# Altium PCB SolarPanelPCB_3U_FB_Rev4.14.PcbDoc
Units mm, origin at the board's own origin, x right, y up, seen from the top; angles counter-clockwise.
Board outline 82 x 331.6 mm, 2 copper layers (Top Layer, Bottom Layer), stack 0.56 mm thick; 16 components, 8 nets, 59 pads, 12 vias.
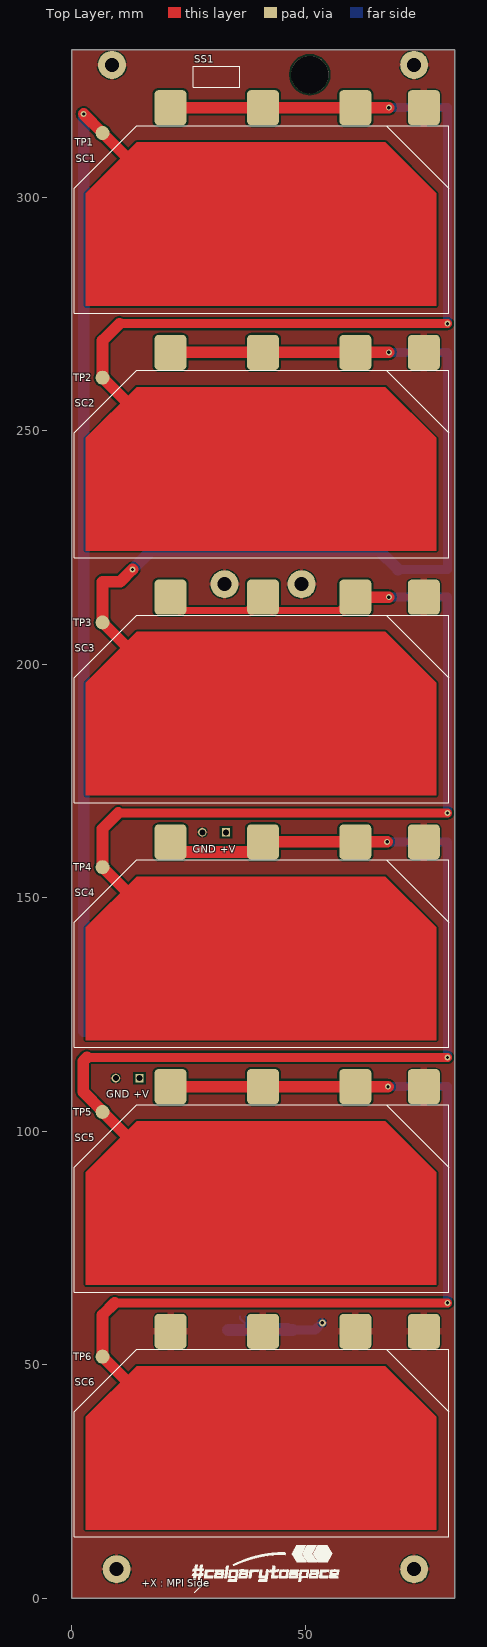
[diagram p0: Top Layer view]
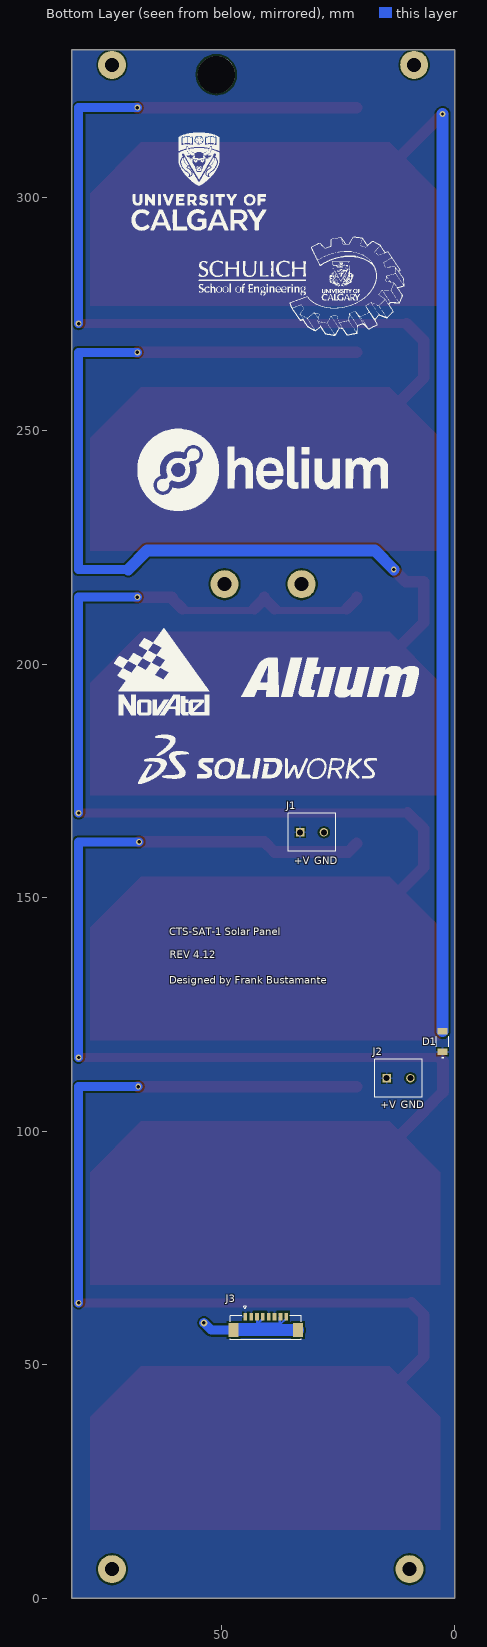
[diagram p1: Bottom Layer view, seen from below]
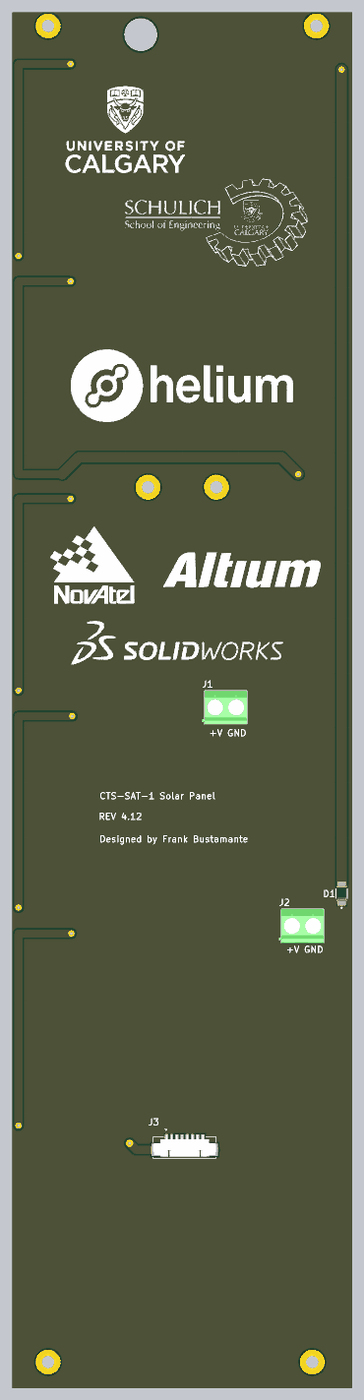
[diagram p2: 3D render of the assembled board from below, using the file's embedded part models]

## Layer stack, top to bottom
Top Solder: solder mask 0.0102, Solder Resist, Dk 3.5
Top Layer: signal copper 0.03
Dielectric 1: core 0.5, FR-4, Dk 4.5
Bottom Layer: signal copper 0.03
Bottom Solder: solder mask 0.0102, Solder Resist, Dk 3.5

## Board outline
0,0 82,0 82,331.6 0,331.6

## Design rules (kind name [scope] priority, off if disabled: settings)
Clearance [InNetClass('Standard_SolarPanel_PCB')] p1: gap=0.4 ignorepadtopadclearanceinfootprint=TRUE
HoleSize [All] p1: absolutevalues=TRUE maxlimit=4 minlimit=0.025 maxpercent=80.000 minpercent=20.000
PolygonConnect [All] p1: connectstyle=Relief reliefconductorwidth=0.254 reliefentries=4 polygonreliefangle="90 Angle" airgapwidth=0.254
RoutingVias [All] p1: holewidth=0.711 width=1.27 viastyle="Through Hole" minholewidth=0.711 minwidth=1.27 maxholewidth=0.711 maxwidth=1.27
SolderMaskExpansion [All] p1: expansion=0.102 istentingtop=FALSE
Width SolarPanel_route_widths [InNetClass('Standard_SolarPanel_PCB')] p1: maxlimit=6 minlimit=0.254 preferedwidth=2.5 checkconnectedcopper=TRUE
29 further rules are at their usual default settings.

## Classes and differential pairs
net class Standard_SolarPanel_PCB: GND V_Panel V_SC1 V_SC2 V_SC3 V_SC4 V_SC5 V_SC6
component class Shiym_Solar_Panel: J1 J2 J3 SC1 SC2 SC3 SC4 SC5 SC6 TP1 TP2 TP3 TP4 TP5 TP6

## Components (designator, comment, footprint, x,y, rotation, side; value= is the part's Value field where it differs from the comment)
D1 "PMEG3050EP,115" FP-SOD128-MFG 2.575,119.2 r90 bottom
J1 "1729128" PHOE-1729128-2_V 30.525,164.025 r180 bottom
J2 "1729128" PHOE-1729128-2_V 12,111.375 r180 bottom
J3 "J-0532610871" J-532610871 40.425,57.95 r180 bottom
SC1 "SOLAR CELL" SOL_CEL_SHYIM 40.675,295.25 r0 top
SC2 "SOLAR CELL" SOL_CEL_SHYIM 40.675,242.85 r0 top
SC3 "SOLAR CELL" SOL_CEL_SHYIM 40.675,190.45 r0 top
SC4 "SOLAR CELL" SOL_CEL_SHYIM 40.675,138.05 r0 top
SC5 "SOLAR CELL" SOL_CEL_SHYIM 40.675,85.65 r0 top
SC6 "SOLAR CELL" SOL_CEL_SHYIM 40.675,33.25 r0 top
TP1 "TP" TP#1 6.625,313.35 r270 top
TP2 "TP" TP#2 7.325,261.85 r270 top
TP3 "TP" TP#3 6.325,206.75 r90 top
TP4 "TP" TP#4 6.525,155.15 r90 top
TP5 "TP" TP#5 6.725,104.35 r270 top
TP6 "TP" TP#6 6.525,51.75 r270 top

## Footprints (in the part's own frame and the unit in brackets; to place one, negate y for a bottom-side part, rotate by r counter-clockwise, add the part's x,y. Pads: shape width x height; smd on the part's side, far side on the other; paste and mask are expansions set on the pad)
FP-SOD128-MFG [mm]
  rect 1.4x2.1 smd paste-1000 mask+0: 1(-2.2,0) 2(2.2,0)
  silkscreen extent -3.57,-1.35 1.12,1.35, body extent -2.35,-1.25 2.35,1.25, height 1.1
J-532610871 [mm]
  rect 0.8x1.6 smd mask+0: 1(-4.375,2.4) 2(-3.125,2.4) 3(-1.875,2.4) 4(-0.625,2.4) 5(0.625,2.4) 6(1.875,2.4) 7(3.125,2.4) 8(4.375,2.4)
  rect 2.1x3 smd mask+0: S1(-6.925,-0.5) S2(6.925,-0.5)
  silkscreen extent -7.57,-2.6 7.57,4.58, body extent -7.57,-2.14 7.57,3.06, height 3.38
PHOE-1729128-2_V [mm] "Receptacle, 2-Leads, Body 8.1x10.16mm, Pitch 5.08mm"
  rect 1.8x1.8 hole 1.3: 1(-2.54,0)
  round 1.8 hole 1.3: 2(2.54,0)
  silkscreen extent -5.08,-4.05 5.08,4.05, body extent -5.65,-4.05 5.08,4.05, height 10.01
SOL_CEL_SHYIM [mm]
  round 0.025 smd: +V_Cell(0,0)
  rrect25% 6.83x7.5 smd: -V_Cell(-19.5,23.925) -V_Cell(0.3,23.925) -V_Cell(20.075,23.925) -V_Cell(34.746,23.925)
  Top Layer region: -37.625,-18.5 -37.625,5.625 -26.75,16.5 26.5,16.5 37.375,5.625 37.375,-18.5
  silkscreen extent -40.07,-20.07 40.07,20.08
TP#1 [mm]
  round 3 smd: TP_3mm(-0.4,0)
TP#2 [mm]
  round 3 smd: TP_3mm(0.5,-0.7)
TP#3 [mm]
  round 3 smd: TP_3mm(2.2,-0.3)
TP#4 [mm]
  round 3 smd: TP_3mm(1.4,-0.1)
TP#5 [mm]
  round 3 smd: TP_3mm(0.2,-0.1)
TP#6 [mm]
  round 3 smd: TP_3mm(0,0.1)

## Part data
D1: library part CMP-14398-000051-1, "DIODE SCHOTTKY 30V 5A SOD128", RoHS Compliant=Yes
J1 J2: library part CMP-2000-05815-1, "PCB Terminal Block, 13.5 A, 400 V, 2-Pin THD, RoHS, Bulk", Current Rating=13500mA, Manufacturer="Phoenix Contact", Package Description="2-Pin Through Hole Device, Body 8.1 x 10.16 mm, Pitch 5.08 mm", Package Reference=1729128-2, Package Version=03/2015, Voltage Rating=400V, Category="Terminal Blocks", ComponentLink1Description=https://datasheet.ciiva.com:443/pdfs/VipMasterIC/IC/PCON/PCON-S-A0008047989/PCON-S-A0008036843-1.pdf?src-supplier=IHS+Markit, ComponentLink1URL=https://datasheet.ciiva.com:443/pdfs/VipMasterIC/IC/PCON/PCON-S-A0008047989/PCON-S-A0008036843-1.pdf?src-supplier=IHS+Markit, ComponentLink2Description=https://datasheet.ciiva.com/16046/1729128-16046181.pdf?src-supplier=Onlinecomponents.com, ComponentLink2URL=https://datasheet.ciiva.com/16046/1729128-16046181.pdf?src-supplier=Onlinecomponents.com, ComponentLink3Description=https://datasheet.ciiva.com/15169/getdatasheetpartid-199310-15169845.pdf?src-supplier=Verical, ComponentLink3URL=https://datasheet.ciiva.com/15169/getdatasheetpartid-199310-15169845.pdf?src-supplier=Verical, ComponentLink4Description=https://datasheet.ciiva.com/823/1729128-823779.pdf?src-supplier=Digi-Key, ComponentLink4URL=https://datasheet.ciiva.com/823/1729128-823779.pdf?src-supplier=Digi-Key, ComponentLink5Description=https://datasheet.ciiva.com/14607/70054405-14607157.pdf?src-supplier=Allied+Electronics, ComponentLink5URL=https://datasheet.ciiva.com/14607/70054405-14607157.pdf?src-supplier=Allied+Electronics, ComponentLink6Description=https://datasheet.ciiva.com/29218/743664-da-01-en-printklemmenblock-mkdsn-1-5-2-5-08-29218154.pdf?src-supplier=Conrad, ComponentLink6URL=https://datasheet.ciiva.com/29218/743664-da-01-en-printklemmenblock-mkdsn-1-5-2-5-08-29218154.pdf?src-supplier=Conrad, Datasheet URL=https://datasheet.ciiva.com/16046/1729128-16046181.pdf, Datasheet Version=12/2013, Fastening Method=SCREW, Manufacturer Part Number=1729128, Manufacturer URL=http://www.phoenixcontact.com/, Mounting Technology=ThroughHole, No. of Positions=2, No. of Rows=1, Number of Decks=1, Number of Rows=1, Number of Ways=2, Orientation=Horizontal, Package URL=https://www.phoenixcontact.com/online/portal/pi/pxc/product_detail_page/!ut/p/b1/3VdJjqNKFDxLH8AFycySyWY2ozFsEPOMMQaDOX1XedGL_1Vdm5YXJleknhSKeBkvI6EA8ncAo3AYoDhBQGco6KN7VURTdemj9us_IEKEZo_YHiPAEWEFmDGOHMORkqKYCORBZxgL7ZoaZYcbFFUZ3fqxSY6GOuxydWUuHqz1ynmMFygu583Bob0Ewr6Sd_l-5m-kAueHiB0jpRwZwe58wwtkpxtMYd_LmGcDRU02dRNEyWt6Y2ti5pSyJ_reIkzIulrqApdnbT11V5jnCKbYNCvhEM1MCpPByat_X379-iThf08CI5GfOPqfBeS3BRoBOdD55AKVv0iLwCMq-2BrzXWSGRH7pUGD9uwXQjiph3xL0DKQwdGa0JImiIOmBNOestqgwTHSSs2oOep-78apyXQBvNi8ZLaFjvjWvcaUEBu0MC6Wbe-d6mB0FAebo2lUWinqYaZs5DAYzV0RP9yitUjnGJ0iI9xhZkT42OCQNUJJhkgWINNQLP2JFP6OpMg3JCVg70jqHT0lvKOnhHf0lPuOnnLf0VPuWx6_dxwUIvwk5WMkT0kLL1mh61l2yZVSzG3pYV_bqo-mj6uMKwKwdnnW8Jh5RTOJzMOA5c-eJDaZQw4mTMPH02PvS_ZAqNVjVTo2WyYLkwH_KU1mmmG5kjRhDqPXLwwVHvVOjCM60-fpXvTDfMGW1PVFVS1r4e4yVDk4ZdNbkUHvqPqQSeian4UD39fNKmachqdJ1NJbyk8rXT9mXTvPk3oE5meulKGgiruPJek-4I9hTT6G8ZLOyRSm2RRVbThERQad5OS28hdt4YW4vG0stgYYzsWsK4_7y6DZMjJSCqri1kyiZR5vD7pwIrNR7QwPHTcLTI5qT7eRlpHrdGiupYlqQDJ7zy_CND8fWWBoLRXxk1RVcXiBQwbTD4Xi7KL-FuO94t9xaqweXzH, Packing=Bulk, PartNumber=1729128, Pitch=5.08mm, Pricing 1="1=1.1123, 10=1.066, 50=1.0202, 100=0.993, 250=0.929, 500=0.8556, 1000=0.7754, 2500=0.7296 (USD)", Reach SVHC Compliant=No, RoHS=TRUE, RoHS Compliant=Yes, Safety Approval=CSA,CUL,CB,EAC, Stock 1=1412, Supplier 1="Arrow Electronics", Terminal and Terminal Block Type="BARRIER STRIP TERMINAL BLOCK", Wire Cross Section=1.5mm2, Wire/Cable Gauge=16AWG
J3: "CONN HEADER SMD R/A 8POS 1.25MM", Distributor=Digi-Key, Distributor Part #=WM7626CT-ND, Manfacturer=Molex, Manfacturer Part #=0532610871
SC1 SC2 SC3 SC4 SC5 SC6: library part SOL_CEL_SHYIM, "Solar Cell from Shyim", InternalPart#=SC-3GA-3

## Free pads (board coordinates)
  round 6 hole 3: M3(8.65,328.33) M3(9.65,6.26) M3(32.75,217.15) M3(49.25,217.15) M3(73.35,6.26) M3(73.35,328.33)
  round 8 hole 8 unplated: SS1(51,326.25)

## Via types
v1: diameter 1.27, hole 0.711, Top Layer to Bottom Layer, 11 vias
v2: diameter 1.5, hole 0.75, Top Layer to Bottom Layer, 1 vias

## Nets (pads, with @x,y where several pads share a name; then routed paths per layer and width w, separated by ;. In a path a pad name is that pad's centre, name@x,y a point inside that pad or via, vN(x,y) a via of type N, cw(c..) or ccw(c..) an arc to the next point about the centre after c; other vN are vias at no path point)
GND: J1.2 J2.2 J3.3 J3.4 J3.7 J3.8 J3.S1 J3.S2 pad.M3 SC1.-V_Cell@75.421,319.175 SC2.-V_Cell@75.421,266.775 SC3.-V_Cell@75.421,214.375 SC4.-V_Cell@75.421,161.975 SC5.-V_Cell@75.421,109.575 SC6.-V_Cell | length 39.2
  Bottom Layer w0.5: J3.8 36.05,59.95 37.2,58.8 37.743,58.8 ; J3.7 37.45,60.2 37.45,59.093 37.743,58.8 ; J3.4 41.05,59.95 42.2,58.8 ; J3.3 42.3,58.7 ; J3.S1 47.35,57.9 46.55,58.7 42.3,58.7 ; 37.743,58.8 42.2,58.8 ; 42.2,58.8 42.3,58.7
  Bottom Layer w2: J3.S1 52.125,57.45 v2(53.675,59)
  Bottom Layer w2.5: J3.S2 J3.S1
V_Panel: D1.1 J1.1 J2.1 J3.1 J3.2 J3.5 J3.6
V_SC1: D1.2 SC1.+V_Cell TP1.TP_3mm | length 243.6
  Top Layer w2.5: v1(2.575,317.825) 2.575,317.8 TP1.TP_3mm 25.125,295.25 40.425,295.25
  Bottom Layer w2.5: D1.2 v1(2.575,317.825)
V_SC2: SC1.-V_Cell@21.175,319.175 SC1.-V_Cell@40.975,319.175 SC1.-V_Cell@60.75,319.175 SC2.+V_Cell TP2.TP_3mm | length 230.6
  Top Layer w1.95: 10.25,272.925 v1(80.487,272.925)
  Top Layer w2.5: 10.25,272.925 6.625,269.3 TP2.TP_3mm 25.125,242.85 40.425,242.85 ; SC1.-V_Cell@20.925,319.175 21.175,319.175 40.975,319.175 60.75,319.175 v1(67.925,319.175)
  Bottom Layer w1.9: v1(67.925,319.175) 80.487,319.175 v1(80.487,272.925)
V_SC3: SC2.-V_Cell@21.175,266.775 SC2.-V_Cell@40.975,266.775 SC2.-V_Cell@60.75,266.775 SC3.+V_Cell TP3.TP_3mm | length 234.6
  Top Layer w2.5: v1(13.025,220.28) 10.445,217.7 6.625,217.7 TP3.TP_3mm 25.125,190.45 40.425,190.45 ; SC2.-V_Cell@20.925,266.775 21.175,266.775 40.975,266.775 60.75,266.775 v1(67.925,266.775)
  Bottom Layer w1.9: v1(67.925,266.775) 80.487,266.775 80.487,220.28 69.897,220.28
  Bottom Layer w2.5: v1(13.025,220.28) 17.12,224.375 65.802,224.375 69.897,220.28
V_SC4: SC3.-V_Cell@21.175,214.375 SC3.-V_Cell@40.975,214.375 SC3.-V_Cell@60.75,214.375 SC4.+V_Cell TP4.TP_3mm | length 235.9
  Top Layer w1.5: SC3.-V_Cell@23.09,211.875 23.465,211.5 38.185,211.5 SC3.-V_Cell@38.56,211.875 ; SC3.-V_Cell@42.89,211.875 SC3.-V_Cell@43.215,211.55 ; SC3.-V_Cell@43.215,211.5 SC3.-V_Cell@58.01,211.5 ; SC3.-V_Cell@58.01,211.55 SC3.-V_Cell@58.335,211.875
  Top Layer w1.95: 10,168.15 v1(80.487,168.15)
  Top Layer w2.5: 10,168.15 6.625,164.775 TP4.TP_3mm 25.125,138.05 40.425,138.05 ; SC3.-V_Cell@20.925,214.375 20.925,214.04 SC3.-V_Cell@23.09,211.875 ; SC3.-V_Cell@38.56,211.875 SC3.-V_Cell@40.725,214.04 ; SC3.-V_Cell@40.725,214.375 SC3.-V_Cell@40.725,214.04 ; SC3.-V_Cell@42.89,211.875 SC3.-V_Cell@40.725,214.04 ; SC3.-V_Cell@58.335,211.875 60.5,214.04 60.5,214.375 60.75,214.375 v1(67.925,214.375)
  Bottom Layer w1.9: v1(67.925,214.375) 80.487,214.375 v1(80.487,168.15)
V_SC5: SC4.-V_Cell@21.175,161.975 SC4.-V_Cell@40.975,161.975 SC4.-V_Cell@60.75,161.975 SC5.+V_Cell TP5.TP_3mm | length 239.8
  Top Layer w1.95: 3.289,115.825 v1(80.487,115.825)
  Top Layer w2.5: 3.289,115.825 2.475,115.011 2.475,108.435 6.625,104.285 TP5.TP_3mm 25.125,85.65 40.425,85.65 ; SC4.-V_Cell@20.925,161.64 22.765,159.8 38.56,159.8 40.725,161.965 40.725,161.975 40.975,161.975 60.75,161.975 v1(67.55,161.975)
  Bottom Layer w1.9: v1(67.55,161.975) 80.487,161.975 v1(80.487,115.825)
V_SC6: SC5.-V_Cell@21.175,109.575 SC5.-V_Cell@40.975,109.575 SC5.-V_Cell@60.75,109.575 SC6.+V_Cell TP6.TP_3mm | length 231.2
  Top Layer w1.95: 9.225,63.275 v1(80.487,63.275)
  Top Layer w2.5: 9.225,63.275 6.625,60.675 TP6.TP_3mm 25.125,33.25 40.425,33.25 ; SC5.-V_Cell@20.925,109.575 21.175,109.575 40.975,109.575 60.75,109.575 v1(67.725,109.575)
  Bottom Layer w1.9: v1(67.725,109.575) 80.487,109.575 v1(80.487,63.275)

## Polygon pours and split planes (outlines as drawn)
V_Panel on Bottom Layer "V_PANEL_L02_P000" (solid, pour order 0): 0,0 82,0 82,331.6 0,331.6
GND on Top Layer "GND_Polygon" (solid, pour order 1): 0,0 82,0 82,331.6 0,331.6

## Silkscreen, mask and mechanical layers (free items; w line width, h text height)
Top Overlay:
  drawing of 24 lines, arcs and shapes, not listed
  text "SS1" at 26.254,328.754 h1.52
  text "GND" at 25.954,159.654 h1.52
  text "+V" at 31.795,159.654 h1.52
  text "GND" at 7.429,107.204 h1.52
  text "+V" at 13.27,107.204 h1.52
  text "+X : MPI Side" at 15,2.5 h1.52
Bottom Overlay:
  drawing of 271 lines, arcs and shapes, not listed
  text "+V" at 34.335,157.229 h1.52
  text "GND" at 30.016,157.179 h1.52
  text "CTS-SAT-1 Solar Panel" at 61.119,142.004 h1.52
  text "REV 4.12" at 60.992,137.062 h1.52
  text "Designed by Frank Bustamante" at 61.119,131.612 h1.52
  text "GND" at 11.491,104.979 h1.52
  text "+V" at 15.81,104.979 h1.52